# EAGLE board DRV8824%20Drive.brd (EAGLE 7.2.0)
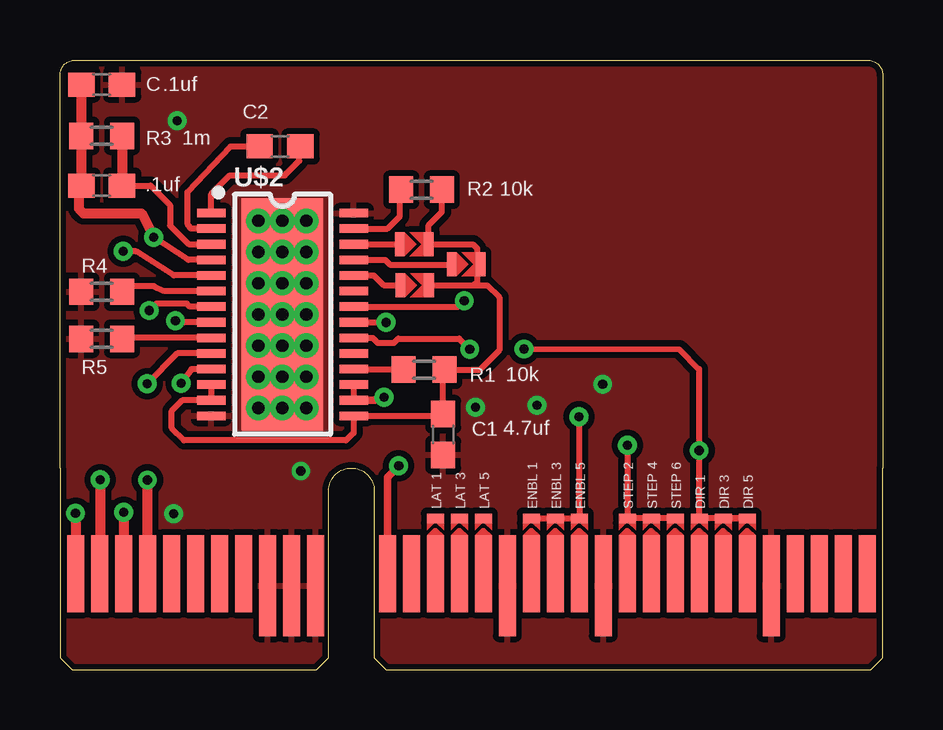
[diagram p0: board, top side]
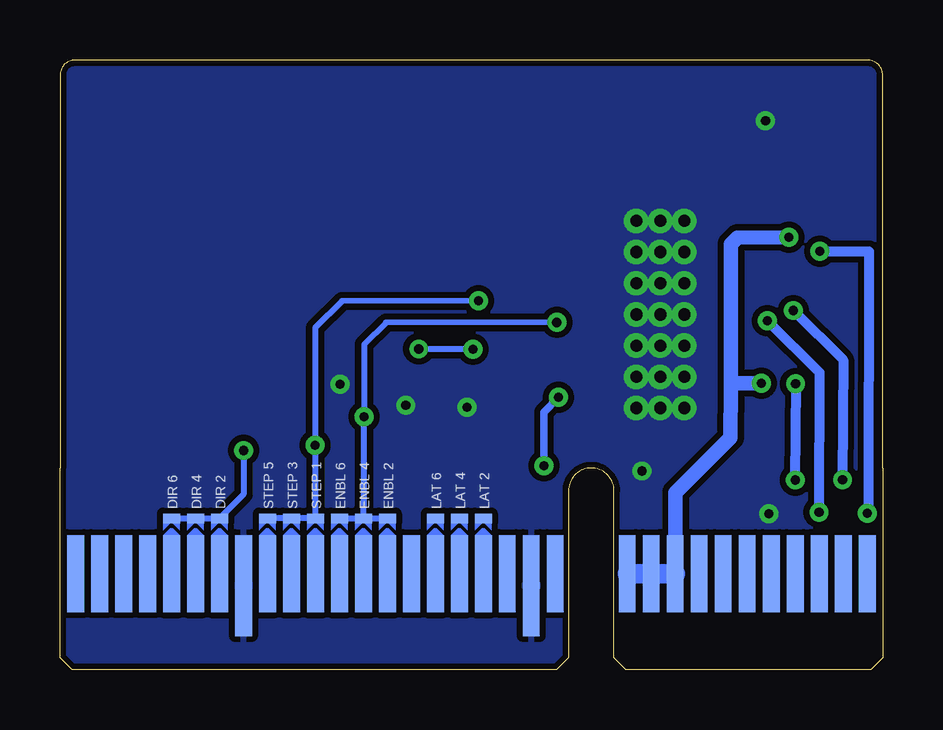
[diagram p1: board, bottom side, seen from below]

Size 34.3 x 25.4 mm. Coordinates in mm from the lower left corner, seen from the top.
Outline: 0,8.4 0,24.77 arc-90 0.64,25.4 33.66,25.4 arc-90 34.3,24.77 34.3,8.4
Copper layers (1*16): Top 0.035mm / dielectric 1.5mm / Bottom 0.035mm
Design rules "default *": minimum track width 10mil, minimum drill 24mil, track to track 10mil, track to pad 10mil, pad to pad 8mil, via to via 8mil, smd to smd 10mil, copper to edge 10mil, drill to drill 8mil, minimum pad ring 10mil, minimum via ring 8mil, stop-mask expansion 4mil, vias tented up to drill 25mil, thermal gap 10mil

## Footprints (pad centres in the part's own frame; a part is rotated, then mirrored left to right if it is on the bottom)
C0603 = smd 1.1 x 1: 1 -0.85,0; 2 0.85,0
R0603 = smd 1 x 1.1: 1 -0.85,0; 2 0.85,0
PCIE_64_SMART_BOARD = smd 0.7 x 4.2: GND@1 8.65,3.5; GND@2 9.65,3.5; GND@3 10.65,3.5; P$49 18.65,3.5; P$53 22.65,3.5; P$60 29.65,3.5 | smd 0.7 x 3.2 bottom: P$1 0.65,4; P$2 1.65,4; P$3 2.65,4; P$4 3.65,4; P$5 4.65,4; P$6 5.65,4; P$7 6.65,4; P$8 7.65,4; P$9 8.65,4; P$10 9.65,4; P$11 10.65,4; P$12 13.65,4; P$14 15.65,4; P$15 16.65,4; P$16 17.65,4; P$17 18.65,4; P$18 19.65,4; P$19 20.65,4; P$20 21.65,4; P$21 22.65,4; P$22 23.65,4; P$23 24.65,4; P$24 25.65,4; P$26 27.65,4; P$27 28.65,4; P$28 29.65,4; P$29 30.65,4; P$30 31.65,4; P$31 32.65,4; P$32 33.65,4 | smd 0.7 x 4.2 bottom: P$13 14.65,3.5; P$25 26.65,3.5 | smd 0.7 x 0.4 bottom: P$15@1 16.65,6.3; P$16@1 17.65,6.3; P$17@1 18.65,6.3; P$19@1 20.65,6.3; P$20@1 21.65,6.3; P$21@1 22.65,6.3; P$22@1 23.65,6.3; P$23@1 24.65,6.3; P$24@1 25.65,6.3; P$26@1 27.65,6.3; P$27@1 28.65,6.3; P$28@1 29.65,6.3 | smd 0.7 x 3.2: P$33 0.65,4; P$34 1.65,4; P$35 2.65,4; P$36 3.65,4; P$37 4.65,4; P$38 5.65,4; P$39 6.65,4; P$40 7.65,4; P$44 13.65,4; P$45 14.65,4; P$46 15.65,4; P$47 16.65,4; P$48 17.65,4; P$50 19.65,4; P$51 20.65,4; P$52 21.65,4; P$54 23.65,4; P$55 24.65,4; P$56 25.65,4; P$57 26.65,4; P$58 27.65,4; P$59 28.65,4; P$61 30.65,4; P$62 31.65,4; P$63 32.65,4; P$64 33.65,4 | smd 0.7 x 0.4: P$46@1 15.65,6.3; P$47@1 16.65,6.3; P$48@1 17.65,6.3; P$50@1 19.65,6.3; P$51@1 20.65,6.3; P$52@1 21.65,6.3; P$54@1 23.65,6.3; P$55@1 24.65,6.3; P$56@1 25.65,6.3; P$57@1 26.65,6.3; P$58@1 27.65,6.3; P$59@1 28.65,6.3
HTSSOP-28 = smd 0.36 x 1.19: 1 -4.225,-2.97; 2 -3.575,-2.97; 3 -2.925,-2.97; 4 -2.275,-2.97; 5 -1.625,-2.97; 6 -0.975,-2.97; 7 -0.325,-2.97; 8 0.325,-2.97; 9 0.975,-2.97; 10 1.625,-2.97; 11 2.275,-2.97; 12 2.925,-2.97; 13 3.575,-2.97; 14 4.225,-2.97; 15 4.225,2.97; 16 3.575,2.97; 17 2.925,2.97; 18 2.275,2.97; 19 1.625,2.97; 20 0.975,2.97; 21 0.325,2.97; 22 -0.325,2.97; 23 -0.975,2.97; 24 -1.625,2.97; 25 -2.275,2.97; 26 -2.925,2.97; 27 -3.575,2.97; 28 -4.225,2.97 | drill 0.508: GND@10 -3.9,1; GND@11 -3.9,0; GND@12 -3.9,-1; GND@13 -2.6,-1; GND@14 -2.6,0; GND@15 -2.6,1; GND@16 -1.3,1; GND@17 -1.3,0; GND@18 -1.3,-1; GND@19 0,-1; GND@20 0,0; GND@21 0,1; GND@22 1.3,1; GND@23 1.3,0; GND@24 1.3,-1; GND@25 2.6,-1; GND@26 2.6,0; GND@27 2.6,1; GND@28 3.9,1; GND@29 3.9,0; GND@30 3.9,-1 | smd 9.7 x 3.4: GND@PAD 0,0
SELECTIVE_CONNECT = smd 0.4 x 1: P$1 0,0; P$2 1.2,0

## Placement (x,y rotation side)
10NF2  .1uf  [C0603]  1.74,20.17 0 top
C  .1uf  [C0603]  1.74,24.37 0 top
C1  4.7uf  [C0603]  15.97,9.8 270 top
C2  .01uf  [C0603]  9.17,21.8 0 top
R1  10k  [R0603]  15.17,12.5 0 top
R2  10k  [R0603]  15.07,20 0 top
R3  1m  [R0603]  1.74,22.24 0 top
R4  [R0603]  1.74,15.74 0 top
R5  [R0603]  1.74,13.78 0 top
U$1  [PCIE_64_SMART_BOARD]  0,0 0 top
U$2  DRV8824  [HTSSOP-28]  9.27,14.8 270 top
U$3  SELECTIVE_CONNECT  [SELECTIVE_CONNECT]  14.17,17.72 0 top
U$4  SELECTIVE_CONNECT  [SELECTIVE_CONNECT]  16.33,16.88 0 top
U$5  SELECTIVE_CONNECT  [SELECTIVE_CONNECT]  14.19,16.01 0 top

## Library data of the parts
10NF2 C C1 C2 R1-R5 = adafruit
U$1-U$5 = PocketNC

## Nets
3.3V: C1.1 U$2.12 U$2.13 U$2.15
3V: R1.2 R2.2 U$3.P$2 U$4.P$2 U$5.P$2
5V: U$1.P$44 U$2.16 U$2.17
A1: U$1.P$33 U$2.5
A2: U$1.P$34 U$2.7
B1: U$1.P$36 U$2.10
B2: U$1.P$35 U$2.8
DIR: U$1.P$26@1 U$1.P$27@1 U$1.P$28@1 U$1.P$57@1 U$1.P$58@1 U$1.P$59@1 U$2.20
ENBL: U$1.P$19@1 U$1.P$20@1 U$1.P$21@1 U$1.P$50@1 U$1.P$51@1 U$1.P$52@1 U$2.21
GND: C1.2 C.2 R4.1 R5.1 U$1.GND@1 U$1.GND@2 U$1.GND@3 U$1.P$13 U$1.P$25 U$1.P$49 U$1.P$53 U$1.P$60 U$2.14 U$2.28 U$2.GND@10 U$2.GND@11 U$2.GND@12 U$2.GND@13 U$2.GND@14 U$2.GND@15 U$2.GND@16 U$2.GND@17 U$2.GND@18 U$2.GND@19 U$2.GND@20 U$2.GND@21 U$2.GND@22 U$2.GND@23 U$2.GND@24 U$2.GND@25 U$2.GND@26 U$2.GND@27 U$2.GND@28 U$2.GND@29 U$2.GND@30 U$2.GND@PAD
N$1: C2.2 U$2.1
N$2: C2.1 U$2.2
N$4: R5.2 U$2.9
N$5: R1.1 U$2.18
N$6: R4.2 U$2.6
N$16: R2.1 U$2.27
N$17: U$2.26 U$3.P$1
N$18: U$2.25 U$4.P$1
N$19: U$2.24 U$5.P$1
STEP: U$1.P$22@1 U$1.P$23@1 U$1.P$24@1 U$1.P$54@1 U$1.P$55@1 U$1.P$56@1 U$2.22
VCC: 10NF2.1 C.1 R3.1 U$1.P$9 U$1.P$10 U$1.P$11 U$2.4 U$2.11
VCP: 10NF2.2 R3.2 U$2.3

## Tracks (layer width: path | path; a pad name or v marks a point on that pad's centre or on a via)
3.3V
  Top 0.254: 15.97,12.45 C1.1 15.9,10.57 U$2.15 12.24,9.87 11.93,9.55 5.17,9.55 4.66,10.06 4.66,10.78 5.1,11.22 U$2.13 U$2.12
3V
  Top 0.254: R2.2 15.93,19.07 15.38,18.52 U$3.P$2 17.22,17.72 17.39,17.55 17.39,17.03 U$4.P$2 17.4,16.75 17.4,16.17 17.24,16.01 U$5.P$2 17.81,16.01 18.31,15.51 18.31,13.31 17.5,12.5 R1.2
5V  (via drill 0.38)
  Top 0.254: U$2.17 U$2.16
  Top 0.305: U$1.P$44 13.65,8.02 v14.12,8.5 | v13.51,11.34 13.25,11.34 13.13,11.23 U$2.16
  Bottom 0.305: v14.12,8.5 14.12,10.73 v13.51,11.34
A1  (via drill 0.38 pad 0.3)
  Top 0.254: U$2.5 4.75,16.42 3.17,17.42 v2.63,17.42
  Top 0.406: v0.65,6.51 U$1.P$33
  Bottom 0.406: v2.63,17.42 0.57,17.42 0.6,6.57 v0.65,6.51
A2  (via drill 0.38)
  Top 0.254: U$2.7 5.41,15.12 5.28,15.25 4.01,15.25 v3.72,14.96
  Top 0.406: v1.68,7.91 1.68,4.03 U$1.P$34
  Bottom 0.406: v3.72,14.96 3.71,14.96 1.65,12.9 v1.68,7.91
B1  (via drill 0.38 pad 0.3)
  Top 0.254: U$2.10 4.89,13.17 v3.63,11.91
  Top 0.406: v3.65,7.9 U$1.P$36
  Bottom 0.406: v3.63,11.91 3.66,7.91 v3.65,7.9
B2  (via drill 0.38)
  Top 0.254: U$2.8 5.14,14.47 v4.81,14.53
  Top 0.406: v2.65,6.55 U$1.P$35
  Bottom 0.406: v4.81,14.53 2.64,12.38 2.67,6.57 v2.65,6.55
DIR  (via drill 0.38 pad 0.3)
  Top 0.254: U$2.20 13.04,13.82 13.25,13.61 13.92,13.61 14.1,13.79 16.64,13.79 v17.08,13.35 | v19.34,13.36 25.82,13.35 26.64,12.52 v26.64,9.13 v26.65,9.13 U$1.P$57@1 U$1.P$59@1 U$1.P$58@1
  Bottom 0.254: U$1.P$28@1 U$1.P$59@1 U$1.P$58@1 26.64,7.3 v26.64,9.13 | v17.08,13.35 19.33,13.35 v19.34,13.36
ENBL  (via drill 0.38 pad 0.3)
  Top 0.254: U$1.P$50@1 U$1.P$51@1 U$1.P$52@1 21.63,7.32 v21.63,10.53 | U$2.21 v13.58,14.47 v13.59,14.46
  Bottom 0.254: v13.59,14.46 20.71,14.45 21.61,13.55 21.61,10.54 v21.63,10.53 21.63,7.32 U$1.P$52@1 | U$1.P$21@1 U$1.P$52@1 | U$1.P$52@1 U$1.P$51@1
GND  (via drill 0.38)
  other vias: 4.89,22.86 4.74,6.5 17.33,10.93 19.88,11.02 10.04,8.27 22.63,11.89
  pour Bottom: -3.37,25.91 37.8,26 37.5,-2 -3.67,-2.09
  pour Top: -3.3,26.5 38.2,26.5 38,-2.5 -3.5,-2.5
N$1
  Top 0.254: U$2.1 6.3,19.83 7.08,20.6 9.38,20.6 9.97,21.2 9.97,21.75
  Top 0.406: 9.97,21.75 C2.2
N$2
  Top 0.254: U$2.2 5.46,18.37 5.35,18.51 5.32,18.61 5.32,19.9 7.11,21.81 C2.1
N$4
  Top 0.254: U$2.9 2.89,13.82 R5.2
N$5
  Top 0.254: U$2.18 14.3,12.52 R1.1
N$6
  Top 0.254: 2.92,15.77 R4.2 3.1,15.98 3.91,15.98 4.34,15.77 U$2.6
N$16
  Top 0.254: U$2.27 13.65,18.37 14.18,18.9 14.18,19.95 R2.1
N$17
  Top 0.254: U$2.26 U$3.P$1
N$18
  Top 0.254: U$2.25 13.56,17.07 13.75,16.88 U$4.P$1
N$19
  Top 0.254: U$2.24 13.08,16.42 13.49,16.02 U$5.P$1
STEP  (via drill 0.38 pad 0.3)
  Top 0.254: U$2.22 16.61,15.12 v16.85,15.37 | v23.66,9.35 U$1.P$22@1 U$1.P$23@1 U$1.P$24@1
  Bottom 0.254: v16.85,15.37 22.54,15.35 23.66,14.24 v23.66,9.35 23.65,9.34 U$1.P$22@1 U$1.P$23@1 U$1.P$24@1
VCC  (via drill 0.38)
  Top 0.254: U$2.4 5.34,17.07 v3.91,18.01 | U$2.11 5.49,12.52 v5.05,11.94
  Top 0.406: v3.91,18.01 3.4,19.01 0.98,19.01 0.79,19.2 0.79,20.17 10NF2.1 R3.1 C.1
  Bottom 0.61: v3.91,18.01 6.06,18 6.33,17.73 6.33,11.75 | 6.33,11.75 6.35,9.66 8.64,7.38 8.64,4.01 U$1.P$9 | v5.05,11.94 6.15,11.93 6.33,11.75
  Bottom 0.813: U$1.P$11 U$1.P$10 U$1.P$9
VCP
  Top 0.254: 10NF2.2 3.77,20.17 4.58,19.36 4.58,18.5 5.36,17.73 U$2.3
  Top 0.406: R3.2 10NF2.2